# Altium PCB PCB_MiniM4.PcbDoc
Units mil, origin at the board's own origin, x right, y up, seen from the top; angles counter-clockwise.
Board outline 1950 x 2325 mil, 2 copper layers (Top Layer, Bottom Layer); 23 components, 38 nets, 109 pads, 12 vias.
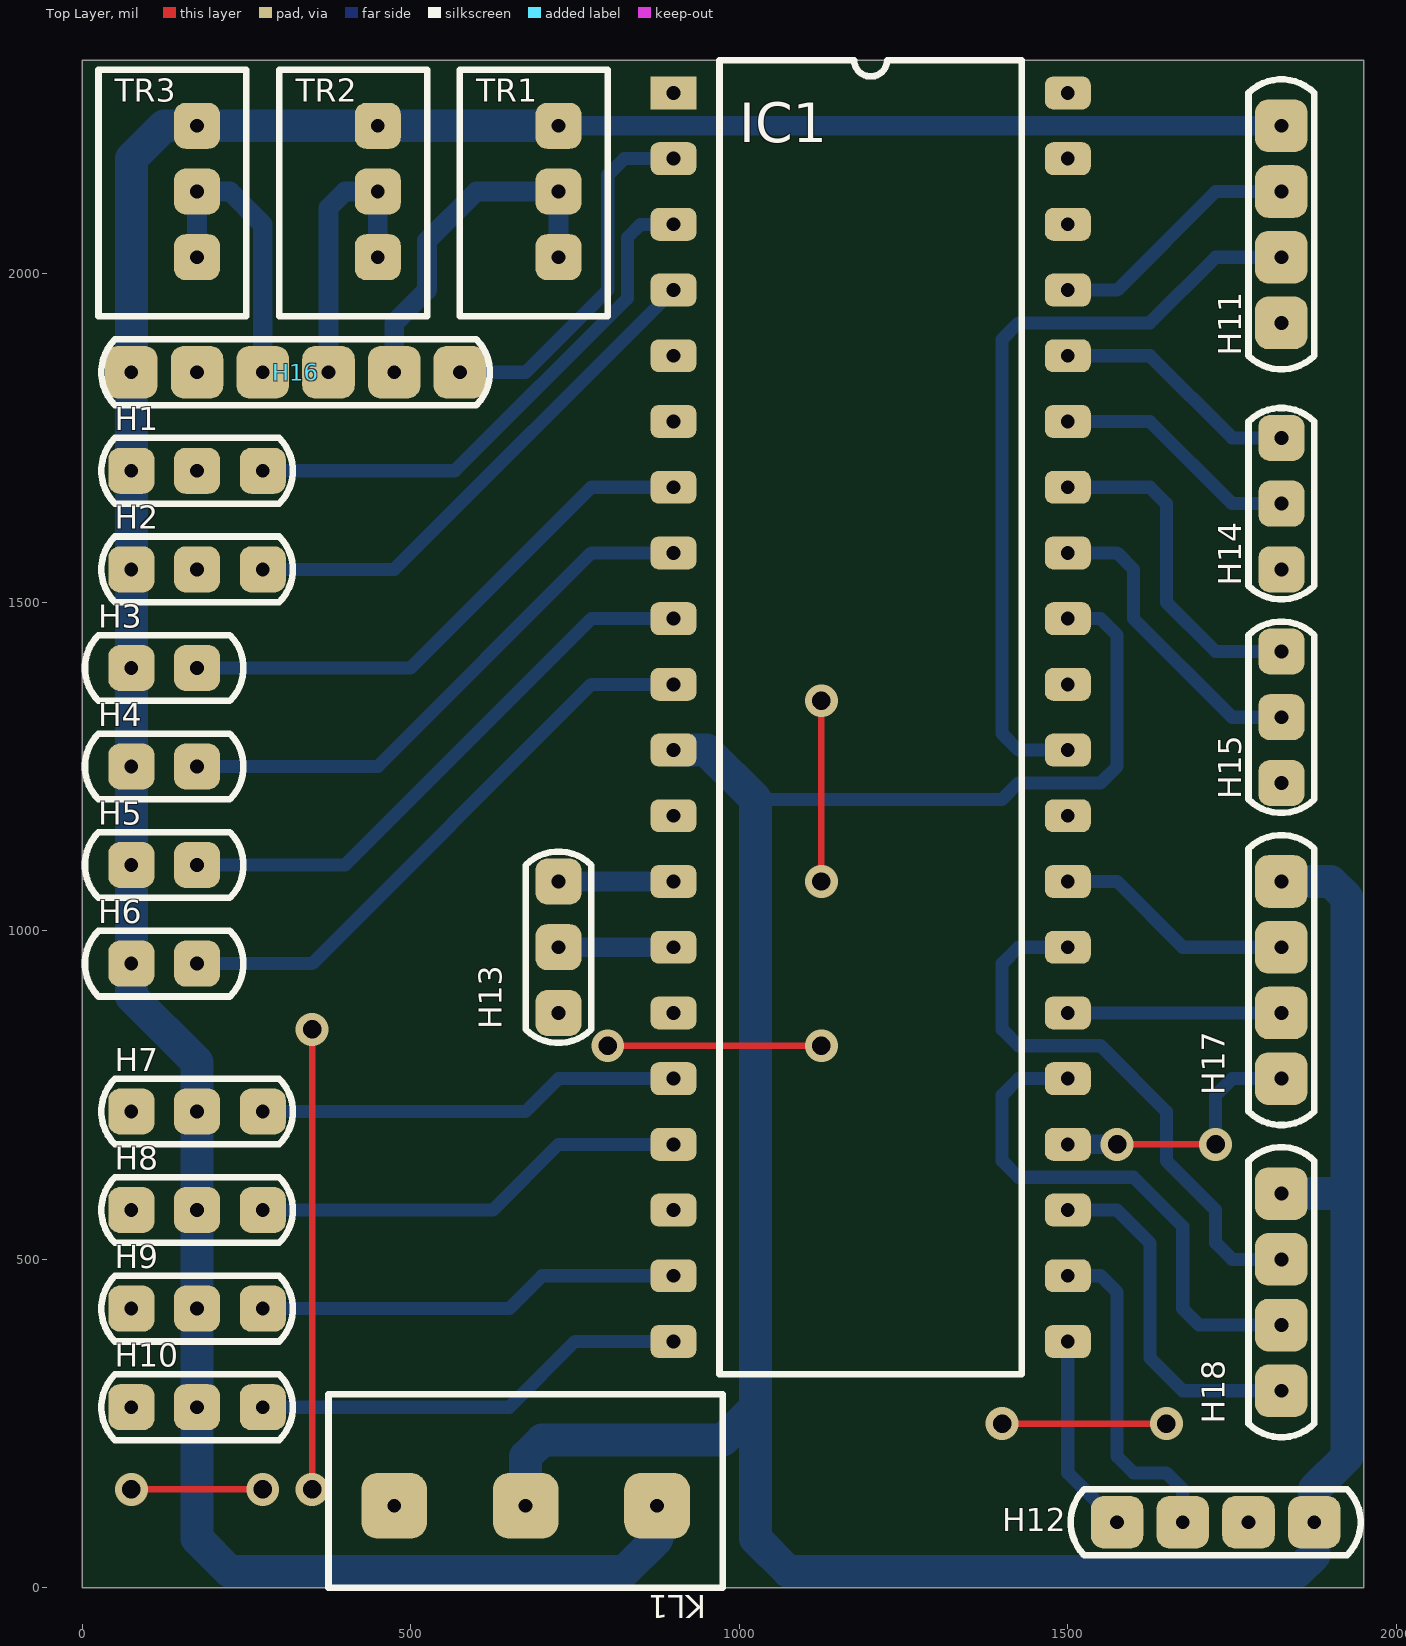
[diagram p0: Top Layer view]
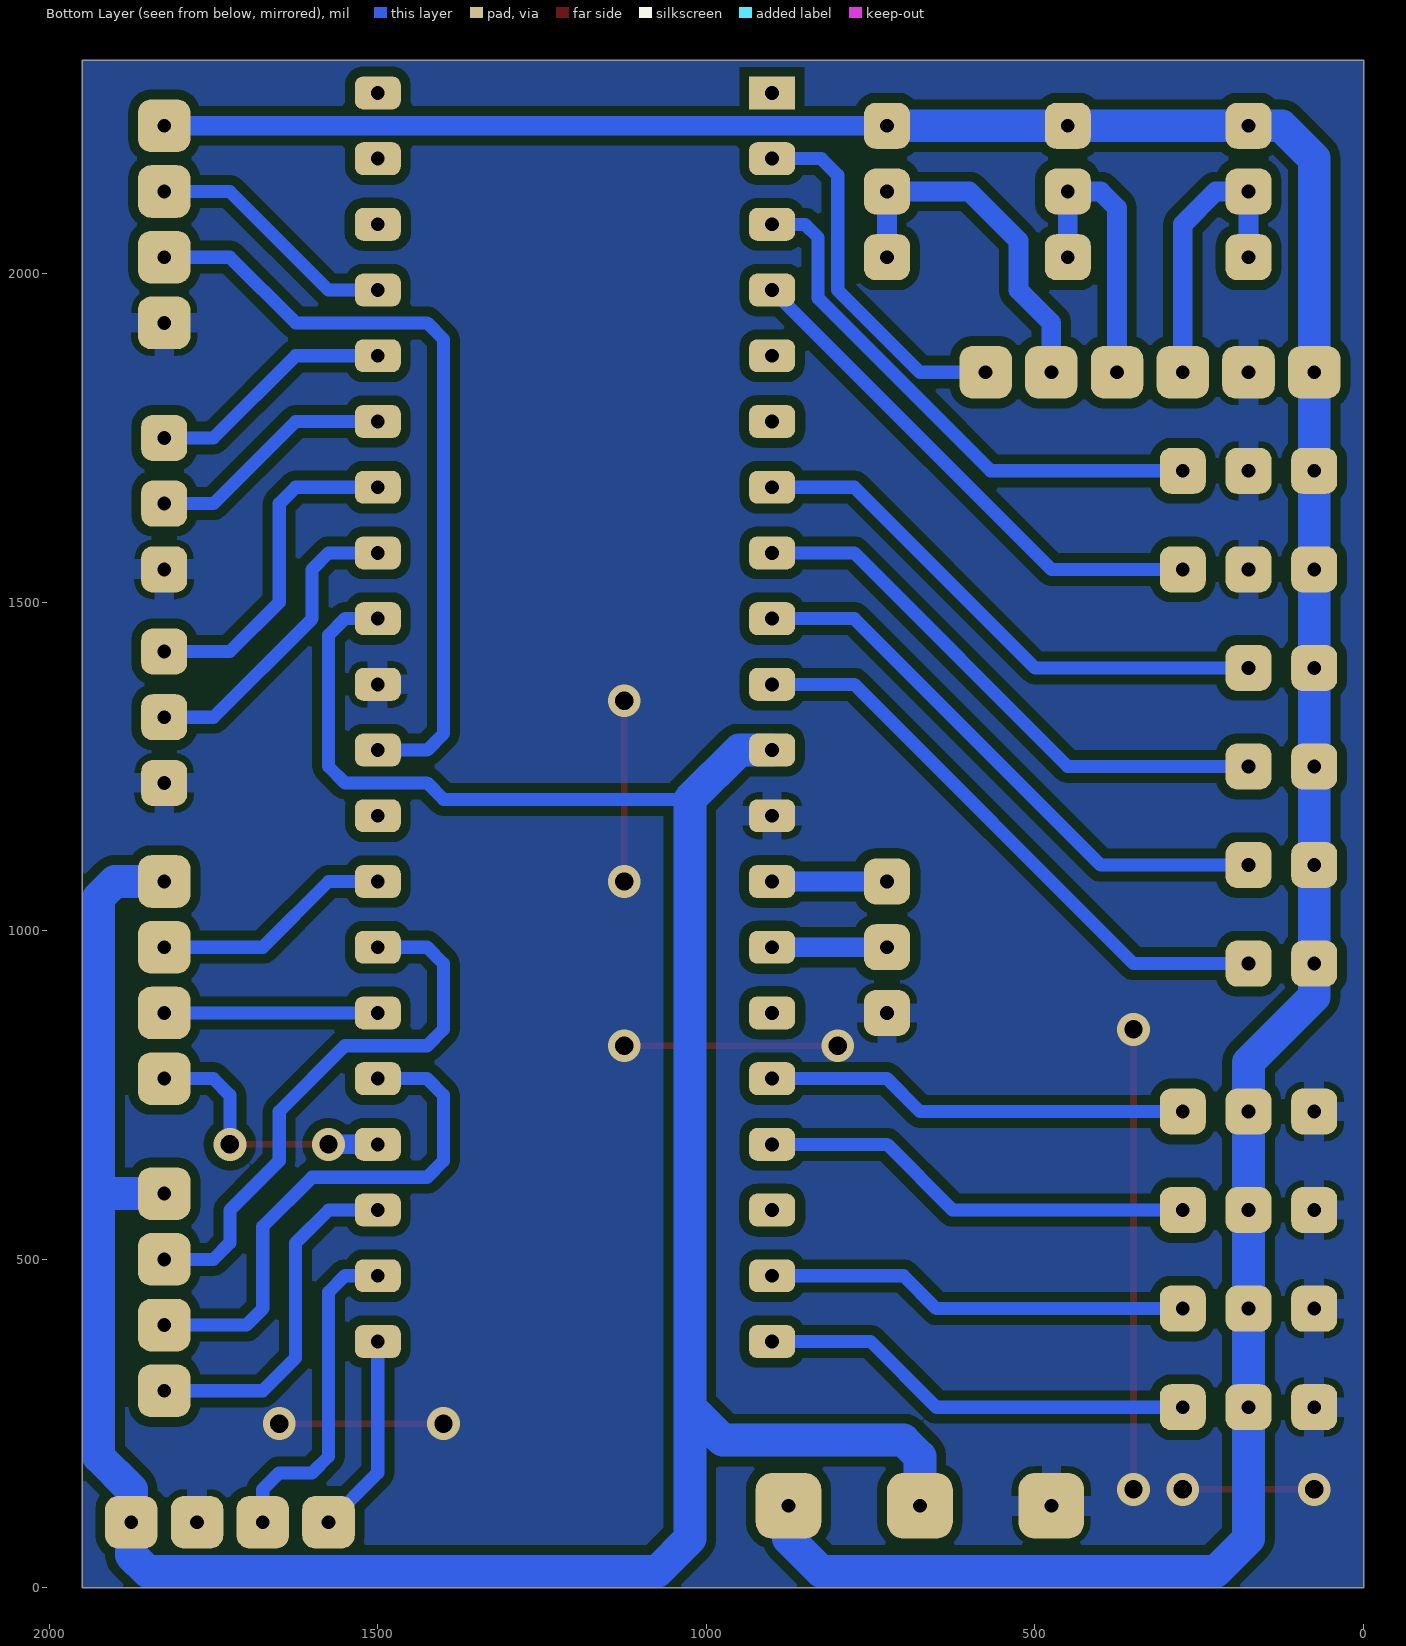
[diagram p1: Bottom Layer view, seen from below]

## Layer stack, top to bottom
Top Solder: solder mask 0.4, Solder Resist, Dk 3.5
Top Layer: signal copper 1.4
Dielectric 1: dielectric 12.6, FR-4, Dk 4.8
Bottom Layer: signal copper 1.4
Bottom Solder: solder mask 0.4, Solder Resist, Dk 3.5

## Board outline
0,0 1950,0 1950,2325 0,2325

## Design rules (kind name [scope] priority, off if disabled: settings)
Clearance [All] p1: gap=15
PlaneConnect [All] p1: planeconnectstyle=Relief reliefexpansion=20 reliefentries=4 reliefconductorwidth=30 reliefairgap=10
PolygonConnect [All] p1: connectstyle=Relief reliefconductorwidth=30 reliefentries=4 polygonreliefangle="90 Angle" airgapwidth=10
RoutingVias [All] p1: holewidth=28 width=50 viastyle="Through Hole" minholewidth=28 minwidth=50 maxholewidth=28 maxwidth=50
SolderMaskExpansion [All] p1: expansion=4
Width [All] p1: maxlimit=50 minlimit=10 preferedwidth=30 toplayer_maxwidth=10 toplayer_prefwidth=10 bottomlayer_minwidth=20 minimp=50.000000 maximp=50.000000 favimp=50.000000
29 further rules are at their usual default settings.

## Components (designator, comment, footprint, x,y, rotation, side; value= is the part's Value field where it differs from the comment)
H1 "Header 1x3" "Header 1x3" 75,1700 r0 top
H2 "Header 1x3" "Header 1x3" 75,1550 r0 top
H3 "Header1x2" Header1x2 75,1400 r0 top
H4 "Header1x2" Header1x2 75,1250 r0 top
H5 "Header1x2" Header1x2 75,1100 r0 top
H6 "Header1x2" Header1x2 75,950 r0 top
H7 "Header 1x3" "Header 1x3" 275,725 r180 top
H8 "Header 1x3" "Header 1x3" 275,575 r180 top
H9 "Header 1x3" "Header 1x3" 275,425 r180 top
H10 "Header 1x3" "Header 1x3" 275,275 r180 top
H11 "Header1x4" Header1x4 1825,2225 r270 top
H12 "Header1x4" Header1x4 1575,100 r0 top
H13 "Header 1x3" "Header 1x3" 725,875 r90 top
H14 "Header 1x3" "Header 1x3" 1825,1550 r90 top
H15 "Header 1x3" "Header 1x3" 1825,1225 r90 top
H16 "Header1x6" Header1x6 575,1850 r180 top
H17 "Header1x4" Header1x4 1825,775 r90 top
H18 "Header1x4" Header1x4 1825,300 r90 top
IC1 "MINI M4 MikroE" DIP40 900,2275 r0 top
KL1 "Klema3" Klema3 475,125 r0 top
TR1 "TRIM" TRIM 725,2225 r270 top
TR2 "TRIM" TRIM 450,2225 r270 top
TR3 "TRIM" TRIM 175,2225 r270 top

## Footprints (in the part's own frame and the unit in brackets; to place one, negate y for a bottom-side part, rotate by r counter-clockwise, add the part's x,y. Pads: shape width x height; smd on the part's side, far side on the other; paste and mask are expansions set on the pad)
DIP40 [mil]
  rect 70x50 hole 21: 1(0,0)
  rrect50% 70x50 hole 21: 2(0,-100) 3(0,-200) 4(0,-300) 5(0,-400) 6(0,-500) 7(0,-600) 8(0,-700) 9(0,-800) 10(0,-900) 11(0,-1000) 12(0,-1100) 13(0,-1200) 14(0,-1300) 15(0,-1400) 16(0,-1500) 17(0,-1600) 18(0,-1700) 19(0,-1800) 20(0,-1900) 21(600,-1900) 22(600,-1800) 23(600,-1700) 24(600,-1600) 25(600,-1500) 26(600,-1400) 27(600,-1300) 28(600,-1200) 29(600,-1100) 30(600,-1000) 31(600,-900) 32(600,-800) 33(600,-700) 34(600,-600) 35(600,-500) 36(600,-400) 37(600,-300) 38(600,-200) 39(600,-100) 40(600,0)
  silkscreen extent 70,-1950 530,50, body extent 70,-1955 530,45, height 40
Header1x2 [mil]
  rrect50% 70x70 hole 21: 1(0,0) 2(100,0)
  silkscreen extent -71,-50 171,50
Header1x4 [mil]
  rrect50% 80x80 hole 21: 1(0,0) 2(100,0) 3(200,0) 4(300,0)
  silkscreen extent -71,-50 371,50
Header1x6 [mil]
  rrect50% 80x80 hole 21: 1(0,0) 2(100,0) 3(200,0) 4(300,0) 5(400,0) 6(500,0)
  silkscreen extent -46,-50 546,50, body extent -50,-50 550,50, height 374
"Header 1x3" [mil]
  rrect50% 70x70 hole 21: 1(0,0) 2(100,0) 3(200,0)
  silkscreen extent -46,-50 246,50
Klema3 [mil]
  rrect50% 100x100 hole 21: 1(0,0) 2(200,0) 3(400,0)
  silkscreen extent -100,-125 500,170, body extent -100,-125 500,170, height 394
TRIM [mil]
  rrect50% 70x70 hole 21: 1(0,0) 2(100,0) 3(200,0)
  silkscreen extent -85,-150 290,75, body extent -88,-165 288,75, height 465

## Via types
v1: diameter 50, hole 28, Top Layer to Bottom Layer, 12 vias

## Nets (pads, with @x,y where several pads share a name; then routed paths per layer and width w, separated by ;. In a path a pad name is that pad's centre, name@x,y a point inside that pad or via, vN(x,y) a via of type N, cw(c..) or ccw(c..) an arc to the next point about the centre after c; other vN are vias at no path point)
3V3: H12.4 H17.4 H18.4 IC1.11 IC1.32 KL1.2 | length 4705.3
  Bottom Layer w20: 1025,1200 1400,1200 1425,1225 1550,1225 1575,1250 1575,1450 1550,1475 IC1.32
  Bottom Layer w50: KL1.2 675,200 700,225 975,225 1025,275 ; IC1.11 950,1275 1025,1200 1025,275 ; H18.4 1925,600 ; H17.4 1900,1075 1925,1050 1925,600 ; 1025,275 1025,75 1075,25 1850,25 1875,50 H12.4 1875,150 1925,200 1925,600
5V: H1.1 H2.1 H3.1 H4.1 H5.1 H6.1 H7.2 H8.2 H9.2 H10.2 H11.1 H16.6 KL1.3 TR1.1 TR2.1 TR3.1 | length 4703.6
  Bottom Layer w30: TR1.1 H11.1
  Bottom Layer w50: TR1.1 TR2.1 TR3.1 125,2225 75,2175 H16.6 H1.1 H2.1 H3.1 H4.1 H5.1 H6.1 75,900 175,800 H7.2 H8.2 H9.2 H10.2 175,75 225,25 825,25 875,75 KL1.3
GND: H1.2 H2.2 H7.3 H8.3 H9.3 H10.3 H11.4 H12.3 H13.1 H14.1 H15.1 H16.5 IC1.12 IC1.31 KL1.1 | length 1750
  Top Layer w10: v1(75,150) v1(275,150) ; v1(350,150) v1(350,850) ; v1(800,825) v1(1125,825) ; v1(1125,1075) v1(1125,1350) ; v1(1400,250) v1(1650,250)
PA0: H16.1 IC1.2 | length 562.1
  Bottom Layer w20: H16.1 675,1850 800,1975 800,2150 825,2175 IC1.2
PA1: H1.3 IC1.3 | length 834.5
  Bottom Layer w20: H1.3 567.43,1700 830,1962.57 830,2055 850,2075 IC1.3
PA2: H2.3 IC1.4 | length 801
  Bottom Layer w20: H2.3 475,1550 IC1.4
PA3: IC1.5
PA4: H11.2 IC1.37 | length 387.1
  Bottom Layer w20: IC1.37 1575,1975 1725,2125 H11.2
PA7: IC1.39
PA8: H6.2 IC1.10 | length 901
  Bottom Layer w20: H6.2 350,950 775,1375 IC1.10
PA13: H14.2 IC1.35 | length 376.8
  Bottom Layer w20: IC1.35 1625,1775 1750,1650 H14.2
PA14: H14.3 IC1.36 | length 376.8
  Bottom Layer w20: IC1.36 1625,1875 1750,1750 H14.3
PA15: H11.3 IC1.30 | length 1187.1
  Bottom Layer w20: IC1.30 1425,1275 1400,1300 1400,1900 1425,1925 1625,1925 1725,2025 H11.3
PB0: H9.1 IC1.19 | length 645.7
  Bottom Layer w20: H9.1 650,425 700,475 IC1.19
PB1: H10.1 IC1.20 | length 666.4
  Bottom Layer w20: H10.1 650,275 750,375 IC1.20
PB4: H7.1 IC1.16 | length 645.7
  Bottom Layer w20: H7.1 675,725 725,775 IC1.16
PB5: H8.1 IC1.17 | length 666.4
  Bottom Layer w20: H8.1 625,575 725,675 IC1.17
PB6: H18.2 IC1.25 | length 812.1
  Bottom Layer w20: IC1.25 1425,775 1400,750 1400,650 1425,625 1600,625 1675,550 1675,425 1700,400 H18.2
PB7: H17.2 IC1.26 | length 325
  Bottom Layer w20: IC1.26 H17.2
PB8: H13.2 IC1.14 | length 175
  Bottom Layer w30: H13.2 IC1.14
PB9: H13.3 IC1.13 | length 175
  Bottom Layer w30: H13.3 IC1.13
PB10: H17.3 IC1.28 | length 366.4
  Bottom Layer w20: IC1.28 1575,1075 1675,975 H17.3
PB11: H18.3 IC1.27 | length 853.6
  Bottom Layer w20: IC1.27 1425,975 1400,950 1400,850 1425,825 1550,825 1650,725 1650,650 1725,575 1725,525 1750,500 H18.3
PB12: H3.2 IC1.7 | length 838.9
  Bottom Layer w20: H3.2 500,1400 775,1675 IC1.7
PB13: IC1.18
PB14: H18.1 IC1.23 | length 541.4
  Bottom Layer w20: IC1.23 1575,575 1625,525 1625,350 1675,300 H18.1
PB15: H17.1 IC1.24 | length 410.4
  Top Layer w10: v1(1575,675) v1(1725,675)
  Bottom Layer w20: v1(1725,675) 1725,750 1750,775 H17.1
  Bottom Layer w30: IC1.24 v1(1575,675)
PC0: IC1.6
PC1: H4.2 IC1.8 | length 859.6
  Bottom Layer w20: H4.2 450,1250 775,1575 IC1.8
PC2: H5.2 IC1.9 | length 880.3
  Bottom Layer w20: H5.2 400,1100 775,1475 IC1.9
PC4: H15.3 IC1.34 | length 516.4
  Bottom Layer w20: IC1.34 1625,1675 1650,1650 1650,1500 1725,1425 H15.3
PC5: H15.2 IC1.33 | length 472.5
  Bottom Layer w20: IC1.33 1575,1575 1600,1550 1600,1475 1750,1325 H15.2
PC9: IC1.15
PC10: H12.1 IC1.21 | length 306.1
  Bottom Layer w20: IC1.21 1500,175 H12.1
PC11: H12.2 IC1.22 | length 506.1
  Bottom Layer w20: IC1.22 1550,475 1575,450 1575,200 1600,175 1650,175 1675,150 H12.2
TR1: H16.2 TR1.2 TR1.3 | length 551.8
  Bottom Layer w30: H16.2 475,1925 525,1975 525,2050 600,2125 TR1.2 TR1.3
TR2: H16.3 TR2.2 TR2.3 | length 435.4
  Bottom Layer w30: H16.3 375,2100 400,2125 TR2.2 TR2.3
TR3: H16.4 TR3.2 TR3.3 | length 445.7
  Bottom Layer w30: TR3.3 TR3.2 225,2125 275,2075 H16.4
pads on no net: IC1.1 IC1.29 IC1.38 IC1.40

## Polygon pours and split planes (outlines as drawn)
GND on Bottom Layer "GND" (solid, pour order 4): 1950,2325 1950,0 0,0 0,2325

## Silkscreen, mask and mechanical layers (free items; w line width, h text height)
Mechanical 1:
  the board outline again, w10